# Altium PCB MainPCB.PcbDoc
Units mm, origin at the board's own origin, x right, y up, seen from the top; angles counter-clockwise.
Board outline 24.89 x 67.69 mm, 2 copper layers (Top Layer, Bottom Layer); 45 components, 39 nets, 171 pads, 58 vias.
Unrouted connection lines stored in the file: 26.
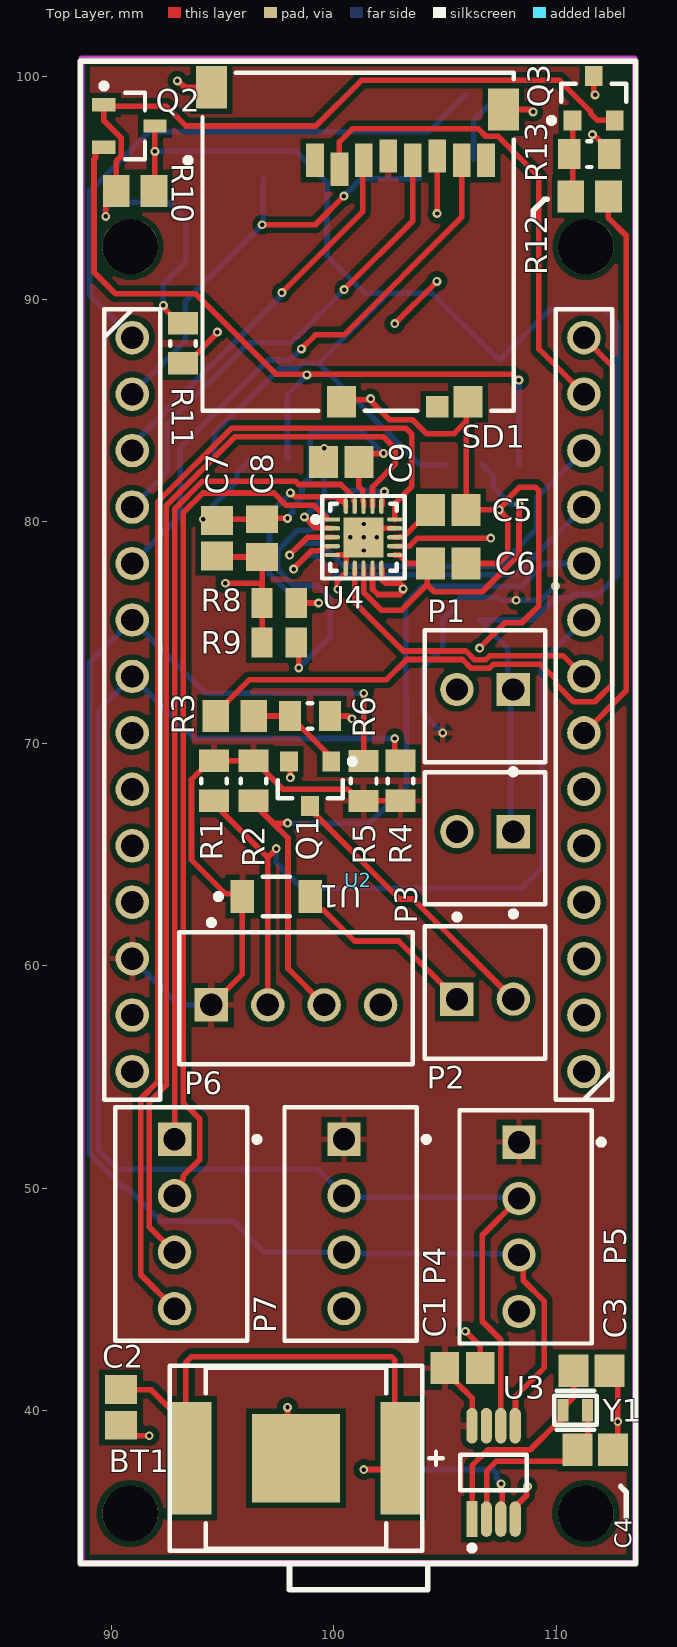
[diagram p0: Top Layer view]
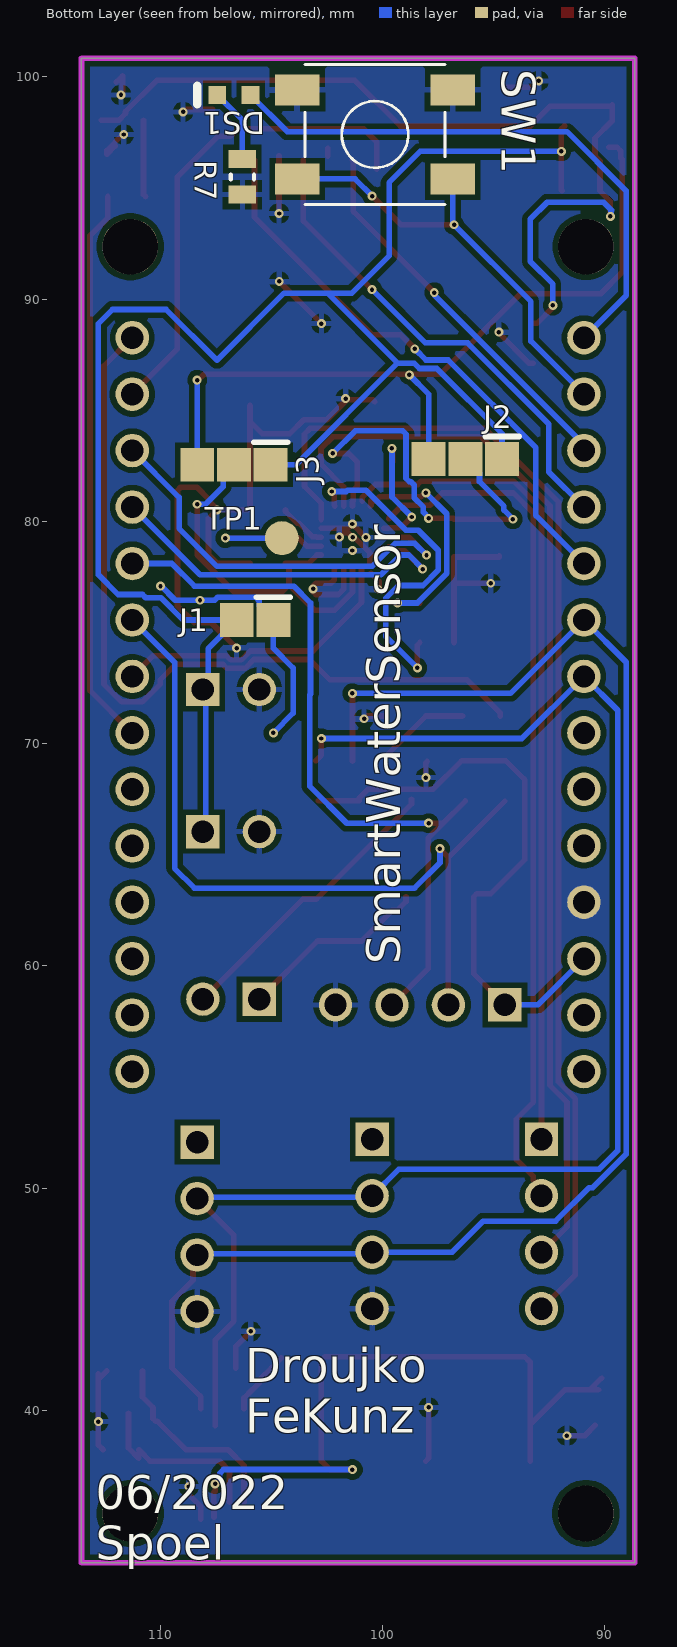
[diagram p1: Bottom Layer view, seen from below]

## Layer stack, top to bottom
Top Solder: solder mask 0.0102, Solder Resist, Dk 3.5
Top Layer: signal copper 0.0356
Dielectric 1: dielectric 0.32, FR-4, Dk 4.8
Bottom Layer: signal copper 0.0356
Bottom Solder: solder mask 0.0102, Solder Resist, Dk 3.5

## Board outline
88.646,33.147 113.538,33.147 113.538,100.838 88.646,100.838

## Design rules (kind name [scope] priority, off if disabled: settings)
Clearance [All] p1: gap=0.254 ignorepadtopadclearanceinfootprint=FALSE except(0: Arc-Hole Track-Hole SMDPad-Hole THPad-Hole Via-Hole Fill-Hole Poly-Hole Region-Hole Text-Hole; 0.127: Arc-Arc Arc-Track Arc-SMDPad Track-Track Track-SMDPad SMDPad-SMDPad; 0.2: Arc-Via Track-Via)
PolygonConnect [All] p1: connectstyle=Relief reliefconductorwidth=0.254 reliefentries=4 polygonreliefangle="90 Angle" airgapwidth=0.254
RoutingVias [All] p1: holewidth=0.2 width=0.4 viastyle="Through Hole" minholewidth=0.2 minwidth=0.4 maxholewidth=0.711 maxwidth=1.27
SolderMaskExpansion [All] p1: expansion=0.102 istentingtop=FALSE
Width [All] p1: maxlimit=0.254 minlimit=0.254 preferedwidth=0.254
30 further rules are at their usual default settings.

## Components (designator, comment, footprint, x,y, rotation, side; value= is the part's Value field where it differs from the comment)
BT1 "LR621" FP-2998-MFG 98.298,37.846 r180 top
C1 "100nF" CAPC2013X140X50NL20T25 105.791,41.91 r180 top
C2 "100nF" CAPC2013X140X50NL20T25 90.424,40.132 r90 top
C3 "10pF" CAPC2013X115X51NL20T26 111.595,41.783 r180 top
C4 "10pF" CAPC2013X115X51NL20T26 111.76,38.227 r180 top
C5 "100nF" CAPC2013X140X50NL20T25 105.156,80.518 r180 top
C6 "100nF" CAPC2013X140X50NL20T25 105.156,78.105 r180 top
C7 "100nF" CAPC2013X140X50NL20T25 94.742,79.248 r270 top
C8 "10uF" CAPC2013X140X45NL15T25 96.774,79.248 r90 top
C9 "100nF" CAPC2013X140X50NL20T25 100.33,82.677 r180 top
DS1 "HSMH-C190" AVAG-HSMX-C190_V 106.68,99.187 r0 bottom
J1 "Jumper_2W" 2w_Jumper 104.902,75.565 r0 bottom
J2 "Jumper_3W" 3W_Jumper 94.615,82.804 r0 bottom
J3 "Jumper_3W" 3W_Jumper 105.029,82.55 r0 bottom
P1 "Battery Connector" 61900211121 106.807,72.136 r0 top
P2 "61900211121" 61900211121 106.807,58.801 r180 top
P3 "VBAT to board" 61900211121 106.807,65.74 r0 top
P4 "61900411121" 61900411121 100.757,48.387 r90 top
P5 "61900411121" 61900411121 108.631,48.26 r90 top
P6 "61900411121" 61900411121 98.298,58.547 r180 top
P7 "61900411121" 61900411121 93.137,48.387 r90 top
Q1 "2N7002LT1G" ONSC-SOT-23-3-318-08_V 98.933,68.199 r270 top
Q2 "BSS84P" INF-PG-SOT23_N 90.805,97.79 r0 top
Q3 "2N7002LT1G" ONSC-SOT-23-3-318-08_V 111.694,99.044 r90 top
R1 "10k" RESC2013X60X35NL10T20 94.615,68.326 r90 top
R2 "10k" RESC2013X60X35NL10T20 96.393,68.326 r90 top
R3 "330R" RESC2013X60X40NL20T25 95.543,71.247 r0 top
R4 "10k" RESC2013X60X35NL10T20 102.997,68.326 r270 top
R5 "10k" RESC2013X60X35NL10T20 101.346,68.315 r270 top
R6 "n.c." RESC2013X60X35NL10T20 98.933,71.247 r180 top
R7 "330R" RESC2013X60X35LL10T20 106.299,95.504 r270 bottom
R8 "150mR" RESC2013X70X40LL20T20 97.536,76.327 r180 top
R9 "150mR" RESC2013X70X40LL20T20 97.536,74.549 r180 top
R10 "10k" RESC2013X60X40NL20T25 91.059,94.869 r0 top
R11 "n.c." RESC2013X60X35NL10T20 93.218,88.011 r270 top
R12 "10k" RESC2013X60X40NL20T25 111.506,94.615 r180 top
R13 "n.c." RESC2013X60X35NL10T20 111.495,96.52 r0 top
SD1 "473521001" MOLX-473521001_V 101.092,92.583 r180 top
SW1 "430481025816" 430481025816 100.33,97.409 r180 bottom
TP1 "Testpad" Testpad 104.521,79.248 r180 bottom
U1 "AL5809-50P1-7" DIOD-POWERDI123-2_B_V 97.409,63.119 r0 top
U2 "Arduino MKR 1310" ArduinoMKR 111.342,35.36 r90 top locked
U3 "PCF85263ATT/AJ" FP-SOT505-1-IPC_B 107.188,37.211 r90 top
U4 "TMC2300-LA-T" FP-TMC2300-LA-T-IPC_C 101.34,79.286 r0 top
Y1 "32.768KHZ" FP-ABS05-MFG 110.871,40.005 r0 top

## Footprints (in the part's own frame and the unit in brackets; to place one, negate y for a bottom-side part, rotate by r counter-clockwise, add the part's x,y. Pads: shape width x height; smd on the part's side, far side on the other; paste and mask are expansions set on the pad)
2w_Jumper [mil]
  rect 60x60 smd: 1(0,0) 2(65,0)
  silkscreen extent -30,-40 30,-40
3W_Jumper [mil]
  rect 60x60 smd: 1(0,0) 2(65,0) 3(130,0)
  silkscreen extent -30,-40 30,-40
61900211121 [mm] "2.54mm Male Locking Header, 2p"
  rect 1.5x1.5 hole 1: 1(1.27,0.3)
  round 1.5 hole 1: 2(-1.27,0.3)
  silkscreen extent -2.71,-3.52 2.71,2.98, body extent -2.54,-2.9 2.54,2.9, height 11.53
61900411121 [mm] "2.54mm Male Locking Header, 4p"
  rect 1.5x1.5 hole 1: 1(3.81,0.3)
  round 1.5 hole 1: 2(1.27,0.3) 3(-1.27,0.3) 4(-3.81,0.3)
  silkscreen extent -5.25,-3.52 5.25,2.98, body extent -5.08,-2.9 5.08,2.9, height 11.53
430481025816 [mm] "6*6mm vertical type,SMD, height 2.5mm, black actuator, 160gf, T&R"
  rect 2x1.4 smd: 1(-3.5,2) 2(3.5,2) 3(-3.5,-2) 4(3.5,-2)
  silkscreen extent -3.15,-3.15 3.15,3.15, body extent -4,-3.1 4,3.1, height 2.49
ArduinoMKR [mm]
  round 1.508 hole 1: 1(19.885,0.09) 2(22.425,0.09) 3(24.965,0.09) 4(27.505,0.09) 5(30.045,0.09) 6(32.585,0.09) 7(35.125,0.09) 8(37.665,0.09) 9(40.205,0.09) 10(42.745,0.09) 11(45.285,0.09) 12(47.825,0.09) 13(50.365,0.09) 14(52.905,0.09) 15(52.905,20.41) 16(50.365,20.41) 17(47.825,20.41) 18(45.285,20.41) 19(42.745,20.41) 20(40.205,20.41) 21(37.665,20.41) 22(35.125,20.41) 23(32.585,20.41) 24(30.045,20.41) 25(27.505,20.41) 26(24.965,20.41) 27(22.425,20.41) 28(19.885,20.41)
  round 2.5 hole 2.5 unplated: MH1(0,0) MH2(0,20.5) MH3(57,20.5) MH4(57,0)
  silkscreen extent -3.43,-2.25 65.35,22.75
AVAG-HSMX-C190_V [mm] "SMD, 2-Leads, Body 1.6x0.8mm, Height 0.9mm"
  rect 0.8x0.8 smd: 1(-0.75,0) 2(0.75,0)
  silkscreen extent 1.65,-0.4 1.65,0.4, body extent -0.8,-0.4 0.8,0.4, height 0.9
CAPC2013X115X51NL20T26 [mm] "Chip Capacitor, 2-Leads, Body 2.01x1.25mm, IPC Medium Density"
  rect 1.35x1.45 smd: 1(-0.8,0) 2(0.8,0)
  body extent -1.11,-0.72 1.1,0.72, height 1.15
CAPC2013X140X45NL15T25 [mm] "Chip Capacitor, 2-Leads, Body 2.00x1.25mm, IPC Medium Density"
  rect 1.25x1.45 smd: 1(-0.85,0) 2(0.85,0)
  body extent -1.08,-0.7 1.07,0.7, height 1.4
CAPC2013X140X50NL20T25 [mm] "Chip Capacitor, 2-Leads, Body 2.00x1.25mm, IPC Medium Density"
  rect 1.3x1.45 smd: 1(-0.8,0) 2(0.8,0)
  body extent -1.1,-0.72 1.1,0.72, height 1.4
DIOD-POWERDI123-2_B_V [mm] "SOD, 2-Leads, Body 2.8x1.78mm"
  rect 1.05x1.5 smd: 1(-1.525,0) 2(1.525,0)
  silkscreen extent -2.72,-0.89 0.6,0.89, body extent -1.4,-0.89 1.4,0.89, height 1.01
FP-2998-MFG [mil]
  rect 156x156 smd paste-39370.1 mask+0: 1(0,0)
  rect 70x200 smd paste+0 mask+0: 2(-185,0) 2(185,0)
  silkscreen extent -260,-164 224,164
FP-ABS05-MFG [mm]
  rect 0.5x1 smd paste+0 mask+0: 1(-0.55,0) 2(0.55,0)
  silkscreen extent -0.95,-0.87 0.95,0.87, body extent -0.95,-0.65 0.95,0.65, height 0.25
FP-SOT505-1-IPC_B [mm]
  rect 1.605x0.5 smd paste+0 mask+0: 1(-2.1,0.975)
  rrect100% 1.605x0.5 smd paste+0 mask+0: 2(-2.1,0.325) 3(-2.1,-0.325) 4(-2.1,-0.975) 5(2.1,-0.975) 6(2.1,-0.325) 7(2.1,0.325) 8(2.1,0.975)
  silkscreen extent -3.53,-1.5 0.8,1.5
FP-TMC2300-LA-T-IPC_C [mm]
  rect 0.706x0.192 smd paste+0 mask+0: 1(-1.403,0.8)
  rrect100% 0.706x0.192 smd paste+0 mask+0: 2(-1.403,0.4) 3(-1.403,0) 4(-1.403,-0.4) 5(-1.403,-0.8) 11(1.403,-0.8) 12(1.403,-0.4) 13(1.403,0) 14(1.403,0.4) 15(1.403,0.8)
  rrect100% 0.192x0.706 smd paste+0 mask+0: 6(-0.8,-1.403) 7(-0.4,-1.403) 8(0,-1.403) 9(0.4,-1.403) 10(0.8,-1.403) 16(0.8,1.403) 17(0.4,1.403) 18(0,1.403) 19(-0.4,1.403) 20(-0.8,1.403)
  rect 1.8x1.8 smd paste-1000 mask+0: 21(0,0)
  silkscreen extent -2.28,-1.86 1.86,1.86, body extent -1.86,-1.86 1.86,1.86, height 0.25
INF-PG-SOT23_N [mm] "SOT23, 3-Leads, Body 2.9x1.3mm, Pitch 0.95mm, IPC Medium Density"
  rect 1.05x0.6 smd: 1(-1.15,0.95) 2(-1.15,-0.95) 3(1.15,0)
  silkscreen extent -1.27,-1.5 0.7,1.92, body extent -0.7,-1.5 0.7,1.5, height 1.1
MOLX-473521001_V [mm] "SMD, 8-Leads, Body 15.2x14mm, Pitch 1.1mm"
  rect 0.8x1.5 smd: 1(1.94,-3.66) 2(0.84,-3.26) 3(-0.26,-3.66) 4(-1.36,-3.86) 5(-2.46,-3.66) 6(-3.56,-3.86) 7(-4.66,-3.66) 8(-5.76,-3.66)
  rect 1x0.95 smd: 9(-3.56,7.425)
  rect 1.3x1.4 smd: 10(-4.95,7.2) 11(0.75,7.2)
  rect 1.4x1.9 smd: 12(6.6,-6.95) 13(-6.55,-5.95)
  silkscreen extent -7,-7.6 7.77,7.6, body extent -7.05,-7.6 7.05,7.6, height 1.85
ONSC-SOT-23-3-318-08_V [mm] "SOT23, 3-Leads, Body 2.92x1.3mm, Pitch 0.95mm"
  rect 0.9x0.8 smd: 1(-1,0.95) 2(-1,-0.95) 3(1,0)
  silkscreen extent -1.12,-1.46 0.65,2.03, body extent -0.65,-1.46 0.65,1.46, height 1.11
RESC2013X60X35LL10T20 [mm] "Chip Resistor, 2-Leads, Body 2.1x1.35mm, IPC High Density"
  rect 0.8x1.25 smd: 1(-0.8,0) 2(0.8,0)
  silkscreen extent -0.1,-0.53 0.1,0.53, body extent -1.05,-0.67 1.05,0.68, height 0.6
RESC2013X60X35NL10T20 [mm] "Chip Resistor, 2-Leads, Body 2.1x1.35mm, IPC Medium Density"
  rect 1x1.35 smd: 1(-0.9,0) 2(0.9,0)
  silkscreen extent -0.1,-0.58 0.1,0.58, body extent -1.05,-0.68 1.05,0.67, height 0.6
RESC2013X60X40NL20T25 [mm] "Chip Resistor, 2-Leads, Body 2.00x1.25mm, IPC Medium Density"
  rect 1.2x1.45 smd: 1(-0.85,0) 2(0.85,0)
  body extent -1.1,-0.72 1.1,0.72, height 0.6
RESC2013X70X40LL20T20 [mm] "Chip Resistor, 2-Leads, Body 2.00x1.25mm, IPC High Density"
  rect 0.95x1.35 smd: 1(-0.775,0) 2(0.775,0)
  body extent -1.1,-0.72 1.1,0.72, height 0.7
Testpad [mil]
  round 60 smd: 1(0,0)

## Part data
BT1: library part CMP-19636-000010-1, "BATTERY RETAINER COIN 6.8MM SMD", Case/Package=SMD/SMT, Color=Silver, Package Quantity=100, Contact Material=Bronze, Height=2.9mm, Lead Free="Lead Free", Material=Bronze, Mount="Surface Mount", Number of Batteries=1, Number of Cells=1, REACH SVHC="No SVHC", Termination=SMD/SMT
C1 C2 C5 C6 C7 C9: library part CMP-2007-04629-1, Manufacturer="AVX Interconnect / Elco", Part Number=08055C104K4Z2A
C3 C4: library part CMP-2007-04860-1, Manufacturer="AVX Interconnect / Elco", Part Number=08052U100GAT2A
C8: library part CMP-2007-03395-1, Manufacturer=Murata, Part Number=GRM21BR71A106KE51L
DS1: library part CMP-1744-00004-1, "LED Uni-Color Red, 65 mW, 20 mA, -40 to 85 degC, 2-Pin SMD, RoHS, Tape and Reel", Current Rating="1 A", Max Operating Temperature="85 degC", Min Operating Temperature="-30 degC", Package Quantity=2000, ComponentLink1Description="Manufacturer URL", ComponentLink1URL=http://www.avagotech.com/, ComponentLink2Description=Datasheet, ComponentLink2URL=http://docs.avagotech.com/docs/AV02-0551EN, ComponentLink3Description="Package Specification", ComponentLink3URL=http://www.fairchildsemi.com/dwg/MA/MA03D.pdf, Connector Type=USB, Contact Material=Copper, Contact Plating=Gold, DatasheetVersion=Mar-12, Gender=Male, Height="2.8 mm", Lead Pitch="0.65 mm", Length="7.5 mm", Mount="Surface Mount", PackageDescription="2-Pin Surface Mount Device, Body 1.6 x 0.8 mm, Height 0.9 mm", PackageReference=HSMX-C190, Packaging="Tape and Reel", Pins=5, REACH SVHC="No SVHC", RoHSCompliant=true, Width="5.6 mm"
P1 P3: library part CMP-1502-00584-1, "Male Locking Header WR-WTB, THT, Vertical, pitch 2.54 mm, 1 x 2 position", Contact Resistance=20mOhm, Manufacturer="Wurth Elektronik", Operating Temperature=-40to105degC, Package Reference=61900211121, Working Voltage=250VAC, Datasheet URL=https://katalog.we-online.de/em/datasheet/6190xx11121.pdf, Gender=Male, Manufacturer URL=http://www.we-online.de, Mounting Technology=THT, Orientation=Vertical, Packaging=Bag, Part Number=61900211121, Pitch=2.54mm, Position=1x2, Publisher=WurthElektronik
P2: library part CMP-1502-00584-1, "Male Locking Header WR-WTB, THT, Vertical, pitch 2.54 mm, 1 x 2 position", Contact Resistance=20mOhm, Manufacturer="Wurth Elektronik", Operating Temperature=-40to105degC, Working Voltage=250VAC, Datasheet URL=https://katalog.we-online.de/em/datasheet/6190xx11121.pdf, Gender=Male, Manufacturer URL=http://www.we-online.de, Mounting Technology=THT, Orientation=Vertical, Package Reference=61900211121, Packaging=Bag, Part Number=61900211121, Pitch=2.54mm, Position=1x2, Publisher=WurthElektronik
P4 P5 P6 P7: library part CMP-1502-00586-1, "Male Locking Header WR-WTB, THT, Vertical, pitch 2.54 mm, 1 x 4 position", Contact Resistance=20mOhm, Manufacturer="Wurth Elektronik", Operating Temperature=-40to105degC, Working Voltage=250VAC, Datasheet URL=https://katalog.we-online.de/em/datasheet/6190xx11121.pdf, Gender=Male, Manufacturer URL=http://www.we-online.de, Mounting Technology=THT, Orientation=Vertical, Package Reference=61900411121, Packaging=Bag, Part Number=61900411121, Pitch=2.54mm, Position=1x4, Publisher=WurthElektronik
Q1 Q3: library part CMP-1058-00781-1, "Small Signal MOSFET, 60 V, 115 mA, N-Channel, 3-Pin SOT-23, Pb-Free, Tape and Reel", Manufacturer="On Semiconductor", Package Type=SOT-23-3, Channel Polarity="N Channel", ComponentLink1Description="Manufacturer URL", ComponentLink1URL=http://www.onsemi.com/, ComponentLink2Description=Datasheet, ComponentLink2URL=http://www.onsemi.com/pub_link/Collateral/2N7002L-D.PDF, ComponentLink3Description="Package Specification", ComponentLink3URL=http://www.onsemi.cn/pub_link/Collateral/318-08.PDF, Configuration=Single, DatasheetVersion="Rev. 7", ID Max (A)=0.115, Mounting Technology="Surface Mount", PackageDescription="3-Pin Small Outline Transistor, Body 2.92 x 1.3 mm, Pitch 0.95 mm", PackageReference=SOT-23-3-318-08, PackageVersion="Rev. AP, 11/2009", Packing="Tape and Reel", PartNumber=2N7002LT1G, RoHS=Pb-Free, V(BR)DSS Min (V)=60, VGS Max (V)=20, VGS(th) Max (V)=2.5
Q2: library part CMP-1099-00028-1, "P-Channel SIPMOS Small-Signal-Transistor, -60 V VDS, -0.17 A ID, -55 to 150 degC, PG-SOT23, Reel, Green", Manufacturer=Infineon, ComponentLink1Description="Manufacturer URL", ComponentLink1URL=http://www.infineon.com/, ComponentLink2Description=Datasheet, ComponentLink2URL=http://www.infineon.com/dgdl/BSS84P_Rev2.7%5B1%5D.pdf?folderId=db3a304314dca38901154a72e3951a65&fileId=db3a304330f68606013118ac7a9b4549, ComponentLink3Description="Package Specification", ComponentLink3URL=http://www.infineon.com/dgdl/SOT23-Package_Overview.pdf?folderId=db3a30431936bc4b0119532290053c66&fileId=db3a30431936bc4b0119533468123c85, DatasheetVersion="Rev. 2.7", Green=TRUE, Halogen-free=TRUE, ID (max)="-0.17Â A", IDpuls (max)="-0.68Â A", Mounting Technology="Surface Mount", PackageDescription="3-Pin Small Outline Transistor Package, 2.9 x 1.3 mm Body, 0.95 mm Pitch", PackageReference=PG-SOT23, PackageVersion=Apr-08, Packing=Reel, PartNumber=BSS84P, Pto t (max)="0.36Â W", QG="1Â nC", RDS (on) (max)="8,000Â mOhm", RDS (on) (max) (@4.5V)="12,000Â mOhm", Rth="350Â K/W", VDS (max)="-60Â V", VGS(th) (max)="-2Â V", VGS(th) (min)="-1Â V"
R1 R2 R4 R5 R6 R11 R13: library part CMP-1659-00013-4, "Chip Resistor, 10 KOhm, +/- 1%, 0.125 W, -55 to 155 degC, 0805 (2012 Metric), RoHS, Tape and Reel", Manufacturer=Yageo, Max Operating Temperature="155 degC", Min Operating Temperature="-55 degC", Package Quantity=5000, Voltage Rating="150 V", ComponentLink1Description="Manufacturer URL", ComponentLink1URL=http://www.yageo.com/, ComponentLink2Description=Datasheet, ComponentLink2URL=http://www.yageo.com/documents/recent/PYu-RC_Group_51_RoHS_L_04.pdf, DatasheetVersion="Rev. 4, 02/2016", Height="0.5 mm", Length="2 mm", Mount="Surface Mount", Mounting Technology="Surface Mount", PackageDescription="2-Pin Surface Mounted Device, Body 2 x 1.25 mm", PackageReference=0805, Packaging="Tape and Reel", Pins=2, REACH SVHC="No SVHC", RoHSCompliant=true
R3 R10 R12: library part CMP-2001-00612-1, Manufacturer=Panasonic, Part Number=ERA6AEB221V
R7: library part CMP-2000-06960-1, "Chip Resistor, 330 Ohm, +/- 1%, 125 mW, -55 to 155 degC, 0805 (2012 Metric), RoHS, Tape and Reel", Case Code - in=0805, Case Code - mm=2012, Manufacturer=Yageo, Operating Temperature Range=-55Cto+155C, Package Description="2-Pin Surface Mounted Device, Body 2 x 1.25 mm", Power Rating=125mW(1/8W), Resistance=330Ohms, Temperature Coefficient=100PPM/C, Tolerance=1%, Voltage Rating=150V, Datasheet URL=http://www.yageo.com/documents/recent/PYu-RC_Group_51_RoHS_L_7.pdf, Datasheet Version="Rev. 7, 05/2017", Manufacturer URL=http://www.yageo.com/, Mounting Technology=SurfaceMount, Package Reference=0805, Packaging=Reel, Product=ThickFilmResistorsGeneralPurpose, Series=RC, Termination Style=SMD/SMT
R8 R9: library part CMP-2001-00505-1, Manufacturer=Panasonic, Part Number=ERJ6BSFR15V
SD1: library part CMP-2000-05848-1, "MicroSD(TM), Pitch 1.1 mm, 8 Position, Height 1.88 mm, -20 to 85 degC, RoHS, Tape and Reel", Manufacturer=Molex, Package Description="MicroSD(TM), Pitch 1.1 mm, 8 Position, Height 1.88 mm", Datasheet URL=http://www.molex.com/pdm_docs/sd/473521001_sd.pdf, Datasheet Version="Rev. G, 01/2012", Manufacturer URL=http://www.molex.com/, Mounting Technology=SurfaceMount, Package Reference=473521001
SW1: library part CMP-1452-00025-1, "WS-TASV SMD Tact Switch 6X6 mm", Manufacturer="Wuerth Elektronik", ComponentLink1Description="Manufacturer URL", ComponentLink1URL=http://www.we-online.com, ComponentLink2Description=Datasheet, ComponentLink2URL=http://katalog.we-online.de/em/datasheet/4304x1.pdf, NoPins=04, PackageReference=430481025816, PartNumber=430481025816
U1: library part CMP-2100-00296-1, "Constant Current LED Driver, 2.5 to 60 V, -40 to 125 degC, 2-Pin SMD, RoHS, Tape and Reel"
U2: library part "Arduino MKR"
U3: library part CMP-10083-000013-1, "IC RTC CLK/CALENDAR I2C 8TSSOP", Case/Package=TSSOP, Max Operating Temperature=85°C, Max Supply Voltage=5.5V, Min Operating Temperature=-40°C, Min Supply Voltage=900mV, Package Quantity=2500, Date Format=YY-MM-DD-dd, Interface=I2C, Lead Free="Lead Free", Logic Function=Clock, Mount="Surface Mount", Number of Pins=8, Packaging="Tape and Reel", Time Format="HH:MM:SS:hh (12/24 hr)", Weight=0.005573oz
U4: library part CMP-237673-000009-1, "LOW VOLTAGE MOTOR DRIVER 2-11V Q"
Y1: library part CMP-27762-008890-1, "CRYSTAL 32.7680KHZ 12.5PF SMD", Case/Package=SMD/SMT, ESR (Equivalent Series Resistance)=90kR, Frequency=32.768kHz, Frequency Tolerance=20ppm, Load Capacitance=12.5pF, Max Operating Temperature=85°C, Min Operating Temperature=-40°C, Operating Frequency="32.768 kHz", Package Quantity=3000, Depth=1mm, Height=0.02inch, Lead Free="Lead Free", Length=1.6mm, Mount="Surface Mount", Number of Pins=2, Packaging="Tape and Reel", Radiation Hardening=No, REACH SVHC="No SVHC", RoHS Compliant=Yes, Series=ABS05, Series Resistance=90kR, Termination=SMD/SMT, Tolerance=20ppm, Width=0.039inch

## Via types
v1: diameter 0.4, hole 0.2, Top Layer to Bottom Layer, 58 vias

## Nets (pads, with @x,y where several pads share a name; then routed paths per layer and width w, separated by ;. In a path a pad name is that pad's centre, name@x,y a point inside that pad or via, vN(x,y) a via of type N, cw(c..) or ccw(c..) an arc to the next point about the centre after c; other vN are vias at no path point)
Anode: P2.1 U1.2 | length 8.6
  Top Layer w0.254: U1.2 98.934,62.894 99.332,62.496 99.557,62.496 100.932,61.121 102.916,61.121 P2.1
CS: SD1.2 U2.13 | length 22
  Top Layer w0.254: SD1.2 100.252,97.077 100.838,97.663 106.503,97.663 106.837,97.329 107.395,97.329 109.227,95.497 109.227,87.75 U2.13
DIR: U2.12 U4.3 | length 19.1
  Top Layer w0.254: v1(98.012,78.485) 98.813,79.286 U4.3
  Bottom Layer w0.254: v1(98.012,78.485) 98.54,79.013 99.425,79.013 100.46,77.978 107.442,77.978 109.146,79.682 109.146,81.079 U2.12
GND: BT1.1 C1.1 C2.1 C3.1 C4.1 C5.1 C6.1 C7.2 C8.1 P1.2 P3.2 P4.4 P5.4 P6.4 Q1.2 Q3.3 R6.1 R7.2 R8.2 R9.2 R11.2 R13.2 SD1.6 SD1.10 SD1.11 SD1.12 SD1.13 SW1.1 SW1.2 U2.25 U3.4 U4.5 U4.6 U4.9 U4.10 U4.14 U4.21 | length 73.6
  Top Layer w0.254: C2.1 90.894,38.862 v1(91.694,38.862) ; v1(92.964,99.822) 93.004,99.822 93.293,99.533 SD1.12 ; R11.2 93.393,87.111 94.731,88.449 94.731,88.491 v1(94.759,88.519) ; C7.2 94.742,78.398 C8.1 96.774,74.549 R9.2 ; v1(95.123,77.216) 96.761,77.216 R8.2 ; v1(97.917,40.132) 97.917,37.846 BT1.1@98.044,37.719 ; Q1.2 98.044,69.138 v1(98.044,68.472) ; R6.1 100.652,71.247 100.779,71.12 v1(100.819,71.12) ; U4.5@100.163,78.502 U4.21@100.556,78.502 ; v1(100.186,76.945) 100.186,76.985 100.15,77.021 100.15,77.298 U4.6@100.509,77.657 ; SD1.11 100.43,85.471 101.56,85.471 101.616,85.526 v1(101.655,85.526) ; U4.6@100.567,78.109 100.567,78.596 U4.21@101.298,79.327 ; v1(100.744,79.281) v1(101.346,79.882) 101.6,79.629 101.6,79.502 101.727,79.502 v1(101.936,79.293) ; v1(101.34,79.286) 101.74,79.686 U4.14 ; v1@101.6,85.471 102.499,84.572 103.535,84.572 104.16,83.947 105.41,83.947 105.914,84.451 ; U4.9 101.74,76.949 101.981,76.708 102.984,76.708 103.133,76.857 103.133,77.067 102.984,77.216 102.32,77.216 102.171,77.365 102.171,77.852 U4.10 ; v1(102.743,88.9) v1(104.64,90.797) ; v1(104.648,93.853) 104.648,96.439 SD1.6 ; v1(105.918,43.561) 106.591,42.888 C1.1 ; C6.1 107.411,78.105 107.823,78.517 107.823,80.137 v1(107.442,80.518) ; SD1.10@105.956,85.213 C5.1 v1(107.442,80.518) ; v1(106.557,74.299) 107.696,75.438 108.458,75.438 109.22,76.2 109.22,81.385 109.071,81.534 108.348,81.534 107.804,80.99 107.804,80.92 107.442,80.558 v1(107.442,80.518) ; SD1.13 108.818,98.533 108.926,98.425 v1(108.966,98.425) ; U3.4 108.163,35.663 108.684,36.184 108.684,36.548 v1(108.712,36.576) ; v1(111.633,97.409) 111.661,97.381 111.709,97.381 112.395,96.695 R13.2 R13.2@112.022,96.893 ; v1(111.76,99.187) 111.76,99.227 111.694,99.293 Q3.3 Q3.3@111.967,99.771 ; C3.1 C3.1@112.776,41.402 ; C4.1 112.776,38.443 C3.1@112.776,41.656
  other v1: 112.776,39.497 103.115,76.962 101.347,78.69
IR_LED: R3.1 U2.14 | length 36.5
  Top Layer w0.254: R3.1 94.693,71.372 96.2,72.879 102.373,72.879 103.281,73.787 105.785,73.787 106.185,73.387 106.989,73.387 107.169,73.567 109.301,73.567 109.99,72.878 109.99,72.682 110.79,71.882 111.738,71.882 112.522,72.666 112.522,86.995 U2.14
Kathode: P2.2 Q1.3 | length 13.2
  Top Layer w0.254: Q1.3@98.69,67.492 98.69,67.283 102.962,63.011 103.567,63.011 P2.2
MISO: SD1.7 U2.19 | length 25.6
  Top Layer w0.254: v1(98.544,87.765) 99.17,88.392 100.457,88.392 105.752,93.687 SD1.7
  Bottom Layer w0.254: U2.19 93.091,80.264 93.091,83.312 97.042,87.263 98.042,87.263 v1(98.544,87.765)
MOSI: SD1.3 U2.17 | length 17.4
  Top Layer w0.254: v1(97.663,90.297) 101.306,93.94 101.306,96.197 SD1.3
  Bottom Layer w0.254: U2.17 90.932,83.448 97.635,90.151 97.635,90.269 v1(97.663,90.297)
Motor_EN: U2.8 U4.7 | length 13.4
  Top Layer w0.254: U4.7 100.94,76.351 103.123,74.168 105.943,74.168 106.343,73.768 106.831,73.768 107.011,73.948 110.329,73.948 U2.8
MOTOR_SUPPLY_EN: R12.1 U2.7 | length 25.3
  Top Layer w0.254: U2.7 113.157,72.39 113.157,92.852 112.356,93.653 R12.1
NetBT1_2: BT1.2 C2.2 U3.3 | length 33.6
  Top Layer w0.254: C2.2@90.132,41.454 90.654,40.932 C2.2 ; C2.2@90.273,40.932 91.783,40.932 BT1.2@93.345,39.37 ; BT1.2@93.345,37.719 BT1.2@93.345,39.37 ; v1(101.346,37.338) 102.362,37.338 102.743,37.719 102.743,42.269 102.594,42.418 93.599,42.418 93.345,42.164 BT1.2@93.345,39.37 ; v1(107.526,36.695) 107.526,36.365 107.583,36.308 107.583,35.853 107.583,35.199 107.569,35.185 U3.3@107.569,35.853
  Bottom Layer w0.254: v1(101.346,37.338) 107.148,37.338 107.318,37.168 107.318,36.942 107.526,36.735 v1(107.526,36.695)
NetC3_2: C3.2 U3.1 Y1.1 | length 9
  Top Layer w0.254: U3.1@106.226,35.872 106.226,37.516 106.937,38.227 108.838,38.227 110.116,39.505 110.198,39.505 110.321,39.628 110.321,40.128 110.795,40.602 C3.2
NetC4_2: C4.2 U3.2 Y1.2 | length 8.1
  Top Layer w0.254: U3.2@106.876,35.872 106.876,37.28 107.315,37.719 110.452,37.719 C4.2 ; C4.2@110.96,37.846 111.421,38.307 Y1.2@111.421,39.878
NetC5_2: C5.2 U4.13 | length 2.2
  Top Layer w0.254: U4.13 102.938,79.286 102.969,79.317 103.155,79.317 103.758,79.92 103.833,79.92 104.356,80.443 C5.2
NetC6_2: C6.2 J3.2 U4.8 U4.11 | length 17.5
  Top Layer w0.254: U4.8 101.34,76.81 102.15,76.001 103.052,76.001 104.199,77.148 ; U4.11 102.938,78.486 103.319,78.105 C6.2 104.199,77.948 104.199,77.148 ; v1(108.331,80.772) 108.331,78.486 106.68,76.835 104.512,76.835 104.199,77.148
  Bottom Layer w0.254: J3.2 107.166,82.064 107.166,81.556 107.95,80.772 v1(108.331,80.772)
NetC7_1: C7.1 C8.2 C9.1 J2.2 U4.18 | length 18.8
  Top Layer w0.254: v1(94.126,80.098) C8.2 96.813,80.137 v1(97.917,80.137) ; U4.18 101.34,80.884 101.309,80.915 101.309,81.392 101.13,81.571 C9.1 101.511,83.058 v1(102.235,83.058)
  Bottom Layer w0.254: v1(94.126,80.098) 94.126,80.103 94.534,80.512 94.534,80.691 95.631,81.788 95.631,82.169 J2.2 ; v1(97.917,80.137) 97.917,80.177 98.152,80.412 98.152,80.645 98.571,81.064 98.571,81.639 98.72,81.788 98.784,81.788 98.933,81.937 98.933,83.925 99.082,84.074 101.219,84.074 v1(102.235,83.058)
NetC9_2: C9.2 U4.2 | length 5.5
  Top Layer w0.254: v1(98.679,80.198) 99.163,79.714 99.711,79.714 99.739,79.686 U4.2 ; C9.2 99.53,83.245 v1(99.568,83.283)
  Bottom Layer w0.254: v1(98.679,80.198) 98.679,80.211 99.568,81.1 v1(99.568,83.283)
NetDS1_1: DS1.1 U2.15 | length 26.1
  Bottom Layer w0.254: U2.15 89.027,90.17 89.027,94.869 91.694,97.536 104.279,97.536 DS1.1
NetDS1_2: DS1.2 R7.1 | length 3.4
  Bottom Layer w0.254: R7.1@106.299,96.288 R7.1 106.299,98.056 DS1.2
NetP7_1: P7.1 U4.19 | length 37.4
  Top Layer w0.254: P7.1 92.837,80.549 94.098,81.809 98.262,81.809 98.411,81.661 100.32,81.661 100.909,81.072 U4.19@100.909,80.915
NetP7_2: P7.2 U4.1 | length 38.9
  Top Layer w0.254: P7.2 92.837,49.994 93.218,50.375 93.218,50.539 93.968,51.289 93.968,53.105 93.218,53.855 93.218,80.391 94.107,81.28 97.301,81.28 97.856,80.725 99.103,80.725 U4.1@99.711,80.117
NetP7_3: P7.3 U4.17 | length 49.2
  Top Layer w0.254: P7.3 91.694,48.26 91.694,53.863 92.456,54.625 92.456,80.707 95.559,83.81 102.228,83.81 102.762,83.276 102.762,82.575 101.74,81.553 U4.17
NetP7_4: P7.4 U4.15 | length 54.3
  Top Layer w0.254: P7.4 91.313,46.101 91.313,54.021 92.075,54.783 92.075,80.864 95.402,84.191 103.241,84.191 103.505,83.927 103.505,81.571 102.743,80.809 U4.15
NetQ1_1: Q1.1 R3.2 R6.2 | length 4.1
  Top Layer w0.254: R3.2 R6.2 Q1.1@99.806,69.474
NetQ2_1: Q2.1 Q3.2 R10.1 R11.1 | length 40.7
  Top Layer w0.254: v1(89.738,93.726) 89.738,94.398 R10.1 90.209,96.21 90.434,96.435 90.434,97.245 89.655,98.024 Q2.1 89.716,98.679 92.456,98.679 93.345,97.79 99.19,97.79 101.244,99.844 110.153,99.844 111.556,98.441 111.556,98.351 111.863,98.044 Q3.2 ; v1(92.329,89.717) 92.357,89.689 92.357,89.597 93.043,88.911 R11.1
  Bottom Layer w0.254: v1(89.738,93.726) 89.71,93.754 89.71,93.964 89.678,93.996 90.043,94.361 92.583,94.361 93.345,93.599 93.345,91.694 92.329,90.678 v1(92.329,89.717)
NetQ3_1: Q3.1 R12.2 R13.1 | length 3.5
  Top Layer w0.254: R12.2 110.744,94.703 Q3.1
NetR8_1: R8.1 U4.20 | length 10.6
  Top Layer w0.254: v1(98.044,81.282) 98.084,81.282 98.26,81.106 100.123,81.106 100.314,80.915 100.509,80.915 100.509,80.72 U4.20 ; R8.1 v1(99.314,76.327)
  Bottom Layer w0.254: v1(98.044,81.282) 97.104,80.343 97.104,77.653 98.43,76.327 v1(99.314,76.327)
NetR9_1: R9.1 U4.16 | length 15.3
  Top Layer w0.254: R9.1 98.425,74.435 v1(98.425,73.406) ; U4.16 102.171,80.72 102.171,81.199 102.278,81.306 v1(102.278,81.345)
  Bottom Layer w0.254: v1(98.425,73.406) 99.841,74.822 99.841,76.545 99.267,77.119 98.177,77.119 97.485,77.81 97.485,78.704 98.383,79.601 98.944,79.601 100.749,81.407 101.57,81.407 101.631,81.345 v1(102.278,81.345)
NetSW1_3: SW1.3 SW1.4 U2.16 | length 20
  Top Layer w0.254: v1(96.774,93.345) 99.163,93.345 v1(100.457,94.639)
  Bottom Layer w0.254: U2.16 93.319,88.112 93.319,89.89 v1(96.774,93.345) 96.774,93.385 96.83,93.441 SW1.4 ; v1(100.457,94.639) 101.227,95.409 SW1.3
NetTP1_1: TP1.1 U4.12 | length 7
  Top Layer w0.254: U4.12 103.403,78.886 103.765,79.248 v1(107.061,79.248)
  Bottom Layer w0.254: TP1.1 v1(107.061,79.248)
SCK_SPI: SD1.5 U2.18 | length 21.9
  Top Layer w0.254: v1(100.465,90.432) 103.552,93.519 SD1.5
  Bottom Layer w0.254: U2.18 92.512,82.225 92.512,84.384 96.161,88.033 98.066,88.033 v1(100.465,90.432)
SCL_1: P4.2 P5.2 R4.1 U2.21 U3.6 | length 67.1
  Top Layer w0.254: v1(102.743,70.231) 102.743,69.48 R4.1 ; U3.6 107.513,43.179 106.68,44.012 106.68,47.879 P5.2
  Bottom Layer w0.254: v1(102.743,70.231) 93.726,70.231 U2.21 89.408,71.501 89.408,51.689 90.241,50.856 99.258,50.856 P4.2 100.52,49.593 108.267,49.593 P5.2
SCL_2: P6.2 R1.1 U2.9 | length 36.2
  Top Layer w0.254: R1.1@94.488,67.415 97.028,64.875 ; P6.2 97.028,64.875 ; v1(97.409,65.278) 97.409,65.256 97.028,64.875
  Bottom Layer w0.254: v1(97.409,65.278) 97.409,64.643 98.552,63.5 108.458,63.5 109.347,64.389 109.347,73.66 U2.9
SDA_1: P4.3 P5.3 R5.1 U2.20 U3.5 | length 68.8
  Top Layer w0.254: R5.1 v1(101.346,72.263) ; U3.5@108.176,40.073 108.176,40.626 109.462,41.912 109.462,44.918 108.521,45.859 108.521,46.8 P5.3
  Bottom Layer w0.254: v1(101.346,72.263) 94.234,72.263 U2.20 89.027,73.66 89.027,51.531 90.536,50.023 90.693,50.023 92.202,48.514 95.462,48.514 96.859,47.117 P4.3 100.52,47.053 108.267,47.053 P5.3
SDA_2: P6.3 R2.1 U2.10 | length 34.2
  Top Layer w0.254: R2.1@96.266,67.426 97.276,66.415 ; v1(97.917,66.421) 97.282,66.421 97.276,66.415 ; P6.3 97.936,59.879 97.936,65.756 97.276,66.415
  Bottom Layer w0.254: v1(97.917,66.421) 101.6,66.421 103.27,68.091 103.27,72.193 103.232,72.231 103.232,76.334 103.987,77.089 108.458,77.089 109.474,78.105 U2.10
STEP: U2.11 U4.4 | length 16.9
  Top Layer w0.254: v1(98.19,77.851) 98.19,77.87 99.002,78.682 99.381,78.682 99.535,78.836 ; 99.536,78.836 99.555,78.855 U4.4@99.711,78.855
  Bottom Layer w0.254: v1(98.19,77.851) 98.19,77.87 98.806,78.486 99.169,78.486 100.058,77.597 108.204,77.597 U2.11
VBAT_3V7: J1.2 J2.1 J3.1 P1.1 P3.1 Q2.3 R10.2 | length 78.5
  Top Layer w0.254: Q2.3@91.805,97.79 91.948,97.647 v1(91.948,96.647) 91.948,94.908 R10.2
  Bottom Layer w0.254: v1(91.948,96.647) 98.298,96.647 99.695,95.25 99.695,91.948 101.373,90.27 102.462,90.27 ; J2.1 94.615,83.947 97.55,86.882 98.329,86.882 98.569,87.122 99.314,87.122 ; J3.1 103.886,82.55 99.314,87.122 ; P3.1@107.95,66.086 107.95,72.424 107.834,72.539 107.834,74.284 J1.2 108.966,75.565 109.963,76.562 110.644,76.562 110.79,76.708 111.887,76.708 112.776,77.597 112.776,88.9 112.141,89.535 109.728,89.535 107.442,87.249 104.421,90.27 102.462,90.27 ; 99.314,87.122 102.462,90.27
VCC_3V3: C1.2 J1.1 P4.1 P5.1 P6.1 R1.2 R2.2 R4.2 R5.2 SD1.4 U1.1 U2.26 U3.8 | length 42
  Top Layer w0.254: P6.1 95.884,59.643 U1.1 95.761,63.242 95.127,63.242 93.599,64.77 93.599,68.385 94.44,69.226 R1.2 R2.2 96.441,69.226 97.722,67.945 100.641,67.945 101.044,67.542 101.044,67.426 R4.2@102.87,67.426 ; SD1.4 SD1.4@102.452,96.793 ; C1.2@104.542,42.359 C1.2 105.514,41.387 105.514,41.253 105.836,40.931 105.854,40.931 106.226,40.559 U3.8@106.226,40.073
  Bottom Layer w0.254: U2.26 93.01,58.247 P6.1 ; v1(104.902,70.485) 104.013,71.374 104.013,73.406 104.902,74.295 J1.1 105.537,76.2 105.537,76.432 105.686,76.581 107.42,76.581 107.547,76.454 v1(108.204,76.454) 109.316,76.454 109.951,77.089 v1(109.982,77.089)
VCC_STEPPER_3V7: J2.3 J3.3 Q2.2 | length 35.2
  Top Layer w0.254: Q2.2@89.805,96.84 89.45,96.84 89.277,96.667 89.277,96.362 89.211,96.296 89.211,91.208 90.174,90.244 93.779,90.244 97.409,86.614 98.768,86.614 v1(98.787,86.595) ; v1@98.787,86.614 108.037,86.614 108.291,86.36 v1(108.331,86.36)
  Bottom Layer w0.254: J2.3 97.917,85.725 v1(98.787,86.595) ; J3.3 v1(108.331,86.36)
pads on no net: SD1.1 SD1.8 SD1.9 U2.1 U2.2 U2.3 U2.4 U2.5 U2.6 U2.22 U2.23 U2.24 U2.27 U2.28 U2.MH1 U2.MH2 U2.MH3 U2.MH4 U3.7

## Polygon pours and split planes (outlines as drawn)
GND on Bottom Layer "GND_L02_P001" (solid, pour order 1): 88.773,100.584 113.538,100.584 113.538,33.147 88.646,33.147
VCC_3V3 on Top Layer "VCC_3V3_L01_P000" (solid, pour order 0): 88.773,100.457 113.411,100.457 113.411,33.274 113.284,33.401 88.646,33.401

## Keep-outs
Keep-Out Layer:
  the board outline again, w0.254

## Silkscreen, mask and mechanical layers (free items; w line width, h text height)
Top Overlay:
  lines w0.254: 108.966,93.599 108.966,93.98 109.474,94.488 109.601,94.488 ; 112.903,36.576 113.157,36.322 113.157,35.179
Bottom Overlay:
  text "SmartWaterSensor" at 99.187,60.071 h1.52 r270
  text "Droujko / FeKunz" at 106.172,38.989 h1.52
  text "06/2022  / Spoel" at 112.899,33.274 h1.52